# Altium PCB boost_machIn.PcbDoc
Units mm, origin at the board's own origin, x right, y up, seen from the top; angles counter-clockwise.
Board outline 38.74 x 27.81 mm, 2 copper layers (Top Layer, Bottom Layer); 6 components, 5 nets, 14 pads, 0 vias.
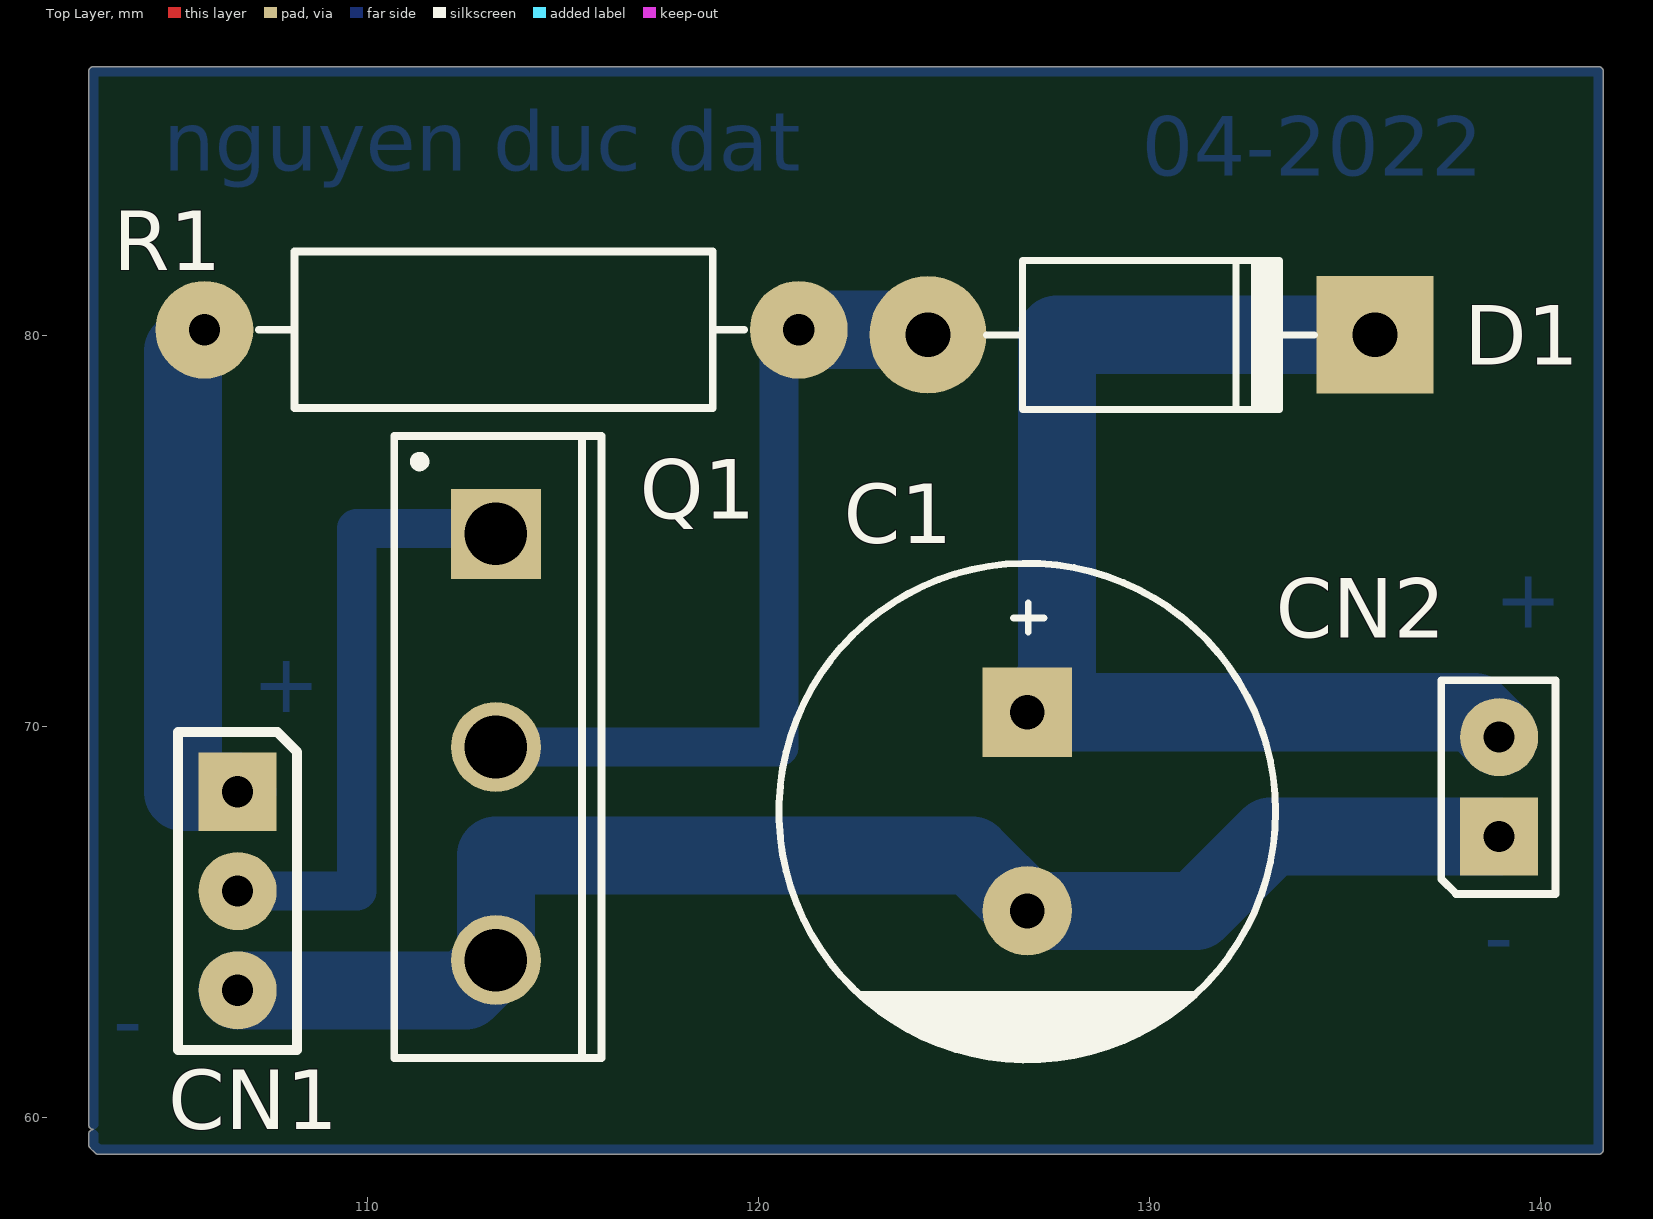
[diagram p0: Top Layer view]
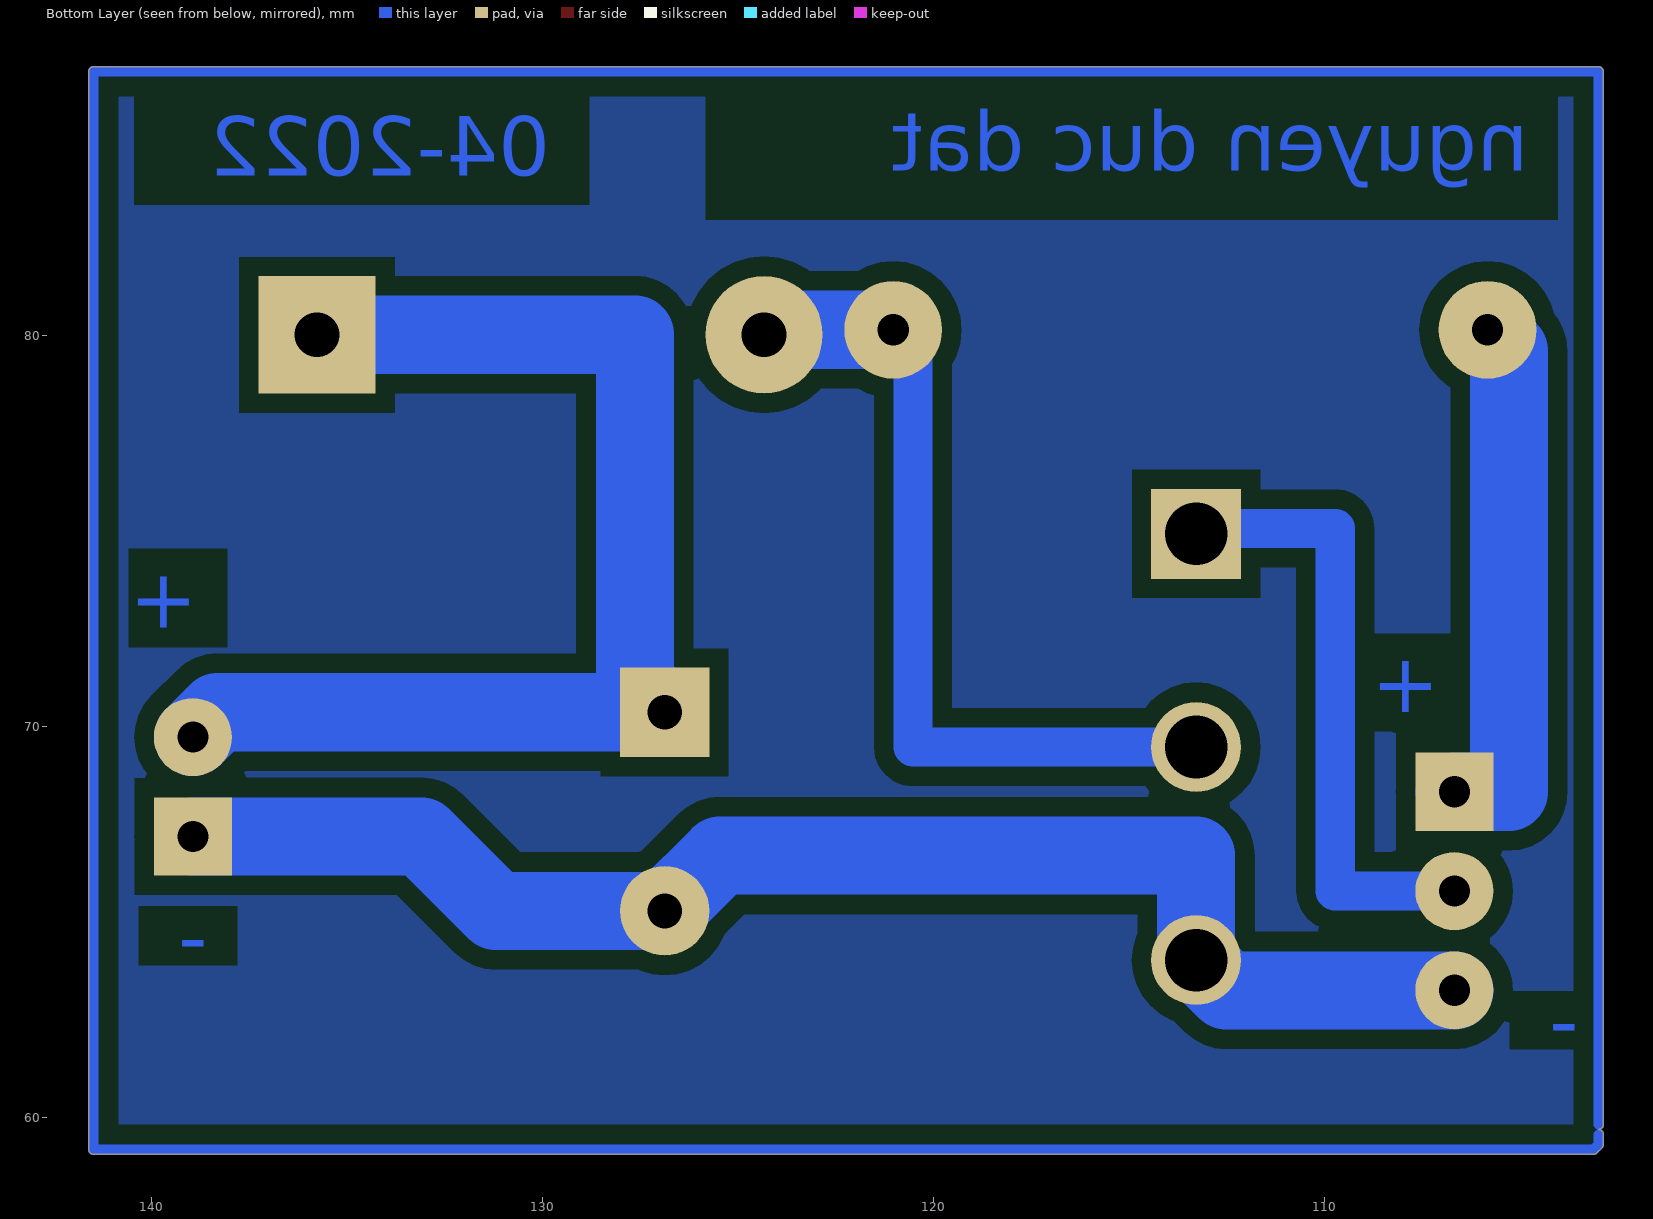
[diagram p1: Bottom Layer view, seen from below]
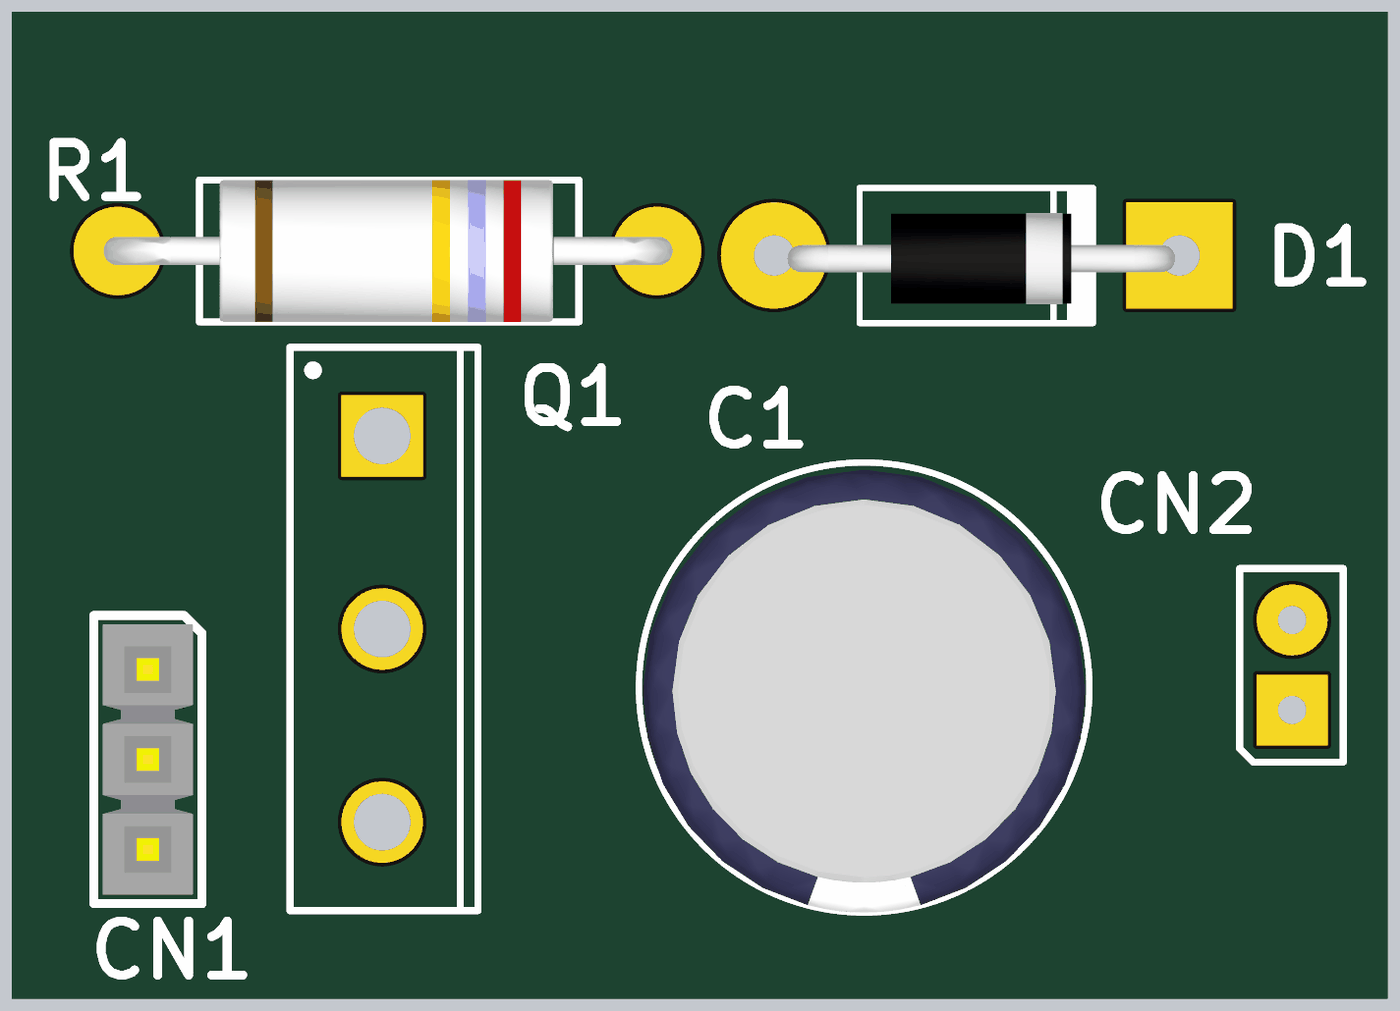
[diagram p2: 3D render of the assembled board from above, using the file's embedded part models]

## Layer stack, top to bottom
Top Solder: solder mask 0.0102, Solder Resist, Dk 3.5
Top Layer: signal copper 0.0356
Dielectric 1: dielectric 0.32, FR-4, Dk 4.8
Bottom Layer: signal copper 0.0356
Bottom Solder: solder mask 0.0102, Solder Resist, Dk 3.5

## Board outline
102.87,59.309 102.87,59.563 cw(c102.997,59.563) 102.987,59.69 cw(c102.997,59.817) 102.87,59.817 102.87,86.741 cw(c102.997,86.741) 102.997,86.868 141.478,86.868 cw(c141.478,86.741) 141.605,86.741 141.605,59.182 cw(c141.478,59.182) 141.478,59.055 103.124,59.055 cw(c103.124,59.182) 103.033,59.092 103.034,59.092 102.907,59.219 102.907,59.218 cw(c102.997,59.309)

## Design rules (kind name [scope] priority, off if disabled: settings)
Clearance [All] p1: gap=0.5
PolygonConnect [All] p1: connectstyle=Relief reliefconductorwidth=0.5 reliefentries=4 polygonreliefangle="90 Angle" airgapwidth=0.5
RoomDefinition boost_nguyenLy [InComponentClass('boost_nguyenLy')] p1: confinementstyle=ConfineIn formatcopy=TRUE lockcomponents=FALSE outline 178.943,26.924 183.515,26.924 183.515,47.752 178.943,47.752
RoutingLayers [All] p1: top layer_v5=FALSE bottom layer_v5=TRUE
RoutingVias [All] p1: holewidth=0.711 width=1.27 viastyle="Through Hole" minholewidth=0.711 minwidth=1.27 maxholewidth=0.711 maxwidth=1.27
SolderMaskExpansion [All] p1: expansion=0.102
Width [All] p1: maxlimit=3 minlimit=0.5 preferedwidth=1
29 further rules are at their usual default settings.

## Components (designator, comment, footprint, x,y, rotation, side; value= is the part's Value field where it differs from the comment)
C1 "Cap Pol3" CP2/5 126.873,70.358 r270 top
CN1 "Con3/Header3" CON3-2 108.204,69.85 r270 top
CN2 "Con2/Header2" CON2-1 138.983,67.238 r90 top
D1 "1N4007" Diode 135.763,80.01 r180 top
Q1 "IGBT-N" TO-247 113.284,69.469 r270 top
R1 "1k" "RESISTOR 2W" 105.831,80.137 r0 top

## Footprints (in the part's own frame and the unit in brackets; to place one, negate y for a bottom-side part, rotate by r counter-clockwise, add the part's x,y. Pads: shape width x height; smd on the part's side, far side on the other; paste and mask are expansions set on the pad)
CON2-1 [mm] "2PIN THANG"
  rect 2x2 hole 0.8: 1(-0.055,0.045)
  round 2 hole 0.8: 2(2.485,0.045)
  silkscreen extent -1.52,-1.4 3.94,1.52, body extent -1.34,-1.23 3.74,1.31, height 8.89
CON3-2 [mm] "CON3 THANG"
  rect 2x2 hole 0.8: 1(1.524,-1.524)
  round 2 hole 0.8: 2(4.064,-1.524) 3(6.604,-1.524)
  silkscreen extent 0,-3.05 8.13,0, body extent 0.25,-2.79 7.87,-0.25, height 2.11
CP2/5 [mil] "Tu hoa 1000uF/25V,50V"
  rect 90x90 hole 35: 1(0,0)
  round 90 hole 35: 2(200,0)
  silkscreen extent -150,-250 350,250, body extent -142,-246 350,246, height 984
Diode [mm] "diode pitch = 450mil"
  round 3 hole 1.143: 1(11.43,0)
  rect 3x3 hole 1.143: 2(0,0)
  silkscreen extent 1.55,-1.9 9.93,1.91, body extent 0.13,-1.19 11.05,1.37, height 2.55
"RESISTOR 2W" [mm] "P=2W, pitch = 15.2mm"
  round 2.5 hole 0.8: 1(0,0) 2(15.2,0)
  silkscreen extent 1.4,-2 13.8,2, body extent -0.4,-2 15.64,2, height 5
TO-247 [mm] "SIP with Mounting Hole; 3 Leads; Body 20 x 15.6 x 5 mm (typ); Pitch 5.45 mm"
  rect 2.3x2.3 hole 1.6: 1(-5.45,0)
  round 2.3 hole 1.6: 2(0,0) 3(5.45,0)
  silkscreen extent -7.95,-2.6 7.95,2.7, body extent -7.95,-2.6 7.95,2.7, height 24.6

## Part data
C1: library part "Cap Pol3_2", "Polarized Capacitor (Surface Mount)"
CN1: "CON3"
CN2: "CON2"
D1: library part Diode, "Diode"
Q1: "Insulated Gate Bipolar Transistor (N-Channel)"
R1: library part RESISTOR, "RESISTOR"

## Nets (pads, with @x,y where several pads share a name; then routed paths per layer and width w, separated by ;. In a path a pad name is that pad's centre, name@x,y a point inside that pad or via, vN(x,y) a via of type N, cw(c..) or ccw(c..) an arc to the next point about the centre after c; other vN are vias at no path point)
NetC1_1: C1.1 CN2.2 D1.2 | length 30.4
  Bottom Layer w2: D1.2 127.635,80.01 127.635,71.12 C1.1 138.303,70.358 CN2.2
NetC1_2: C1.2 CN1.3 CN2.1 Q1.3 | length 36.6
  Bottom Layer w2: CN1.3 112.511,63.246 Q1.3 113.284,66.692 125.459,66.692 C1.2 131.191,65.278 133.096,67.183 CN2.1
NetCN1_1: CN1.1 R1.1 | length 13.4
  Bottom Layer w2: R1.1 105.283,79.589 105.283,68.326 CN1.1
NetCN1_2: CN1.2 Q1.1 | length 16.1
  Bottom Layer w1: CN1.2 109.728,65.786 109.728,75.057 113.146,75.057 Q1.1
  Bottom Layer w2: Q1.1@113.168,74.803 Q1.1
NetD1_1: D1.1 Q1.2 R1.2 | length 21.5
  Bottom Layer w1: Q1.2 120.523,69.469 120.523,79.629 R1.2
  Bottom Layer w2: R1.2 124.206,80.137 D1.1
copper on no net: | length 131.8
  Bottom Layer w0.254: 102.997,59.563 102.997,59.309 103.124,59.182 141.478,59.182 141.478,83.185 141.478,86.741 102.997,86.741 102.997,62.357 102.997,59.817

## Polygon pours and split planes (outlines as drawn)
no net on Bottom Layer "Bottom Layer-No Net" (solid, pour order 2): 102.997,86.741 141.224,86.741 141.478,86.487 141.478,59.436 103.124,59.436 102.997,59.563

## Other copper
Bottom Layer:
  text "nguyen duc dat" at 104.775,84.201 h1.52
  text "04-2022" at 129.794,84.074 h1.52
  text "+" at 138.811,72.517 h1.52
  text "+" at 107.061,70.358 h1.52
  text "-" at 138.557,63.881 h1.52
  text "-" at 103.505,61.722 h1.52